# Altium PCB High.PcbDoc
Units mm, origin at the board's own origin, x right, y up, seen from the top; angles counter-clockwise.
Board outline 51 x 51 mm, 2 copper layers (Top Layer, Bottom Layer), stack 1.571 mm thick; 35 components, 47 nets, 125 pads, 22 vias.
Unrouted connection lines stored in the file: 28.
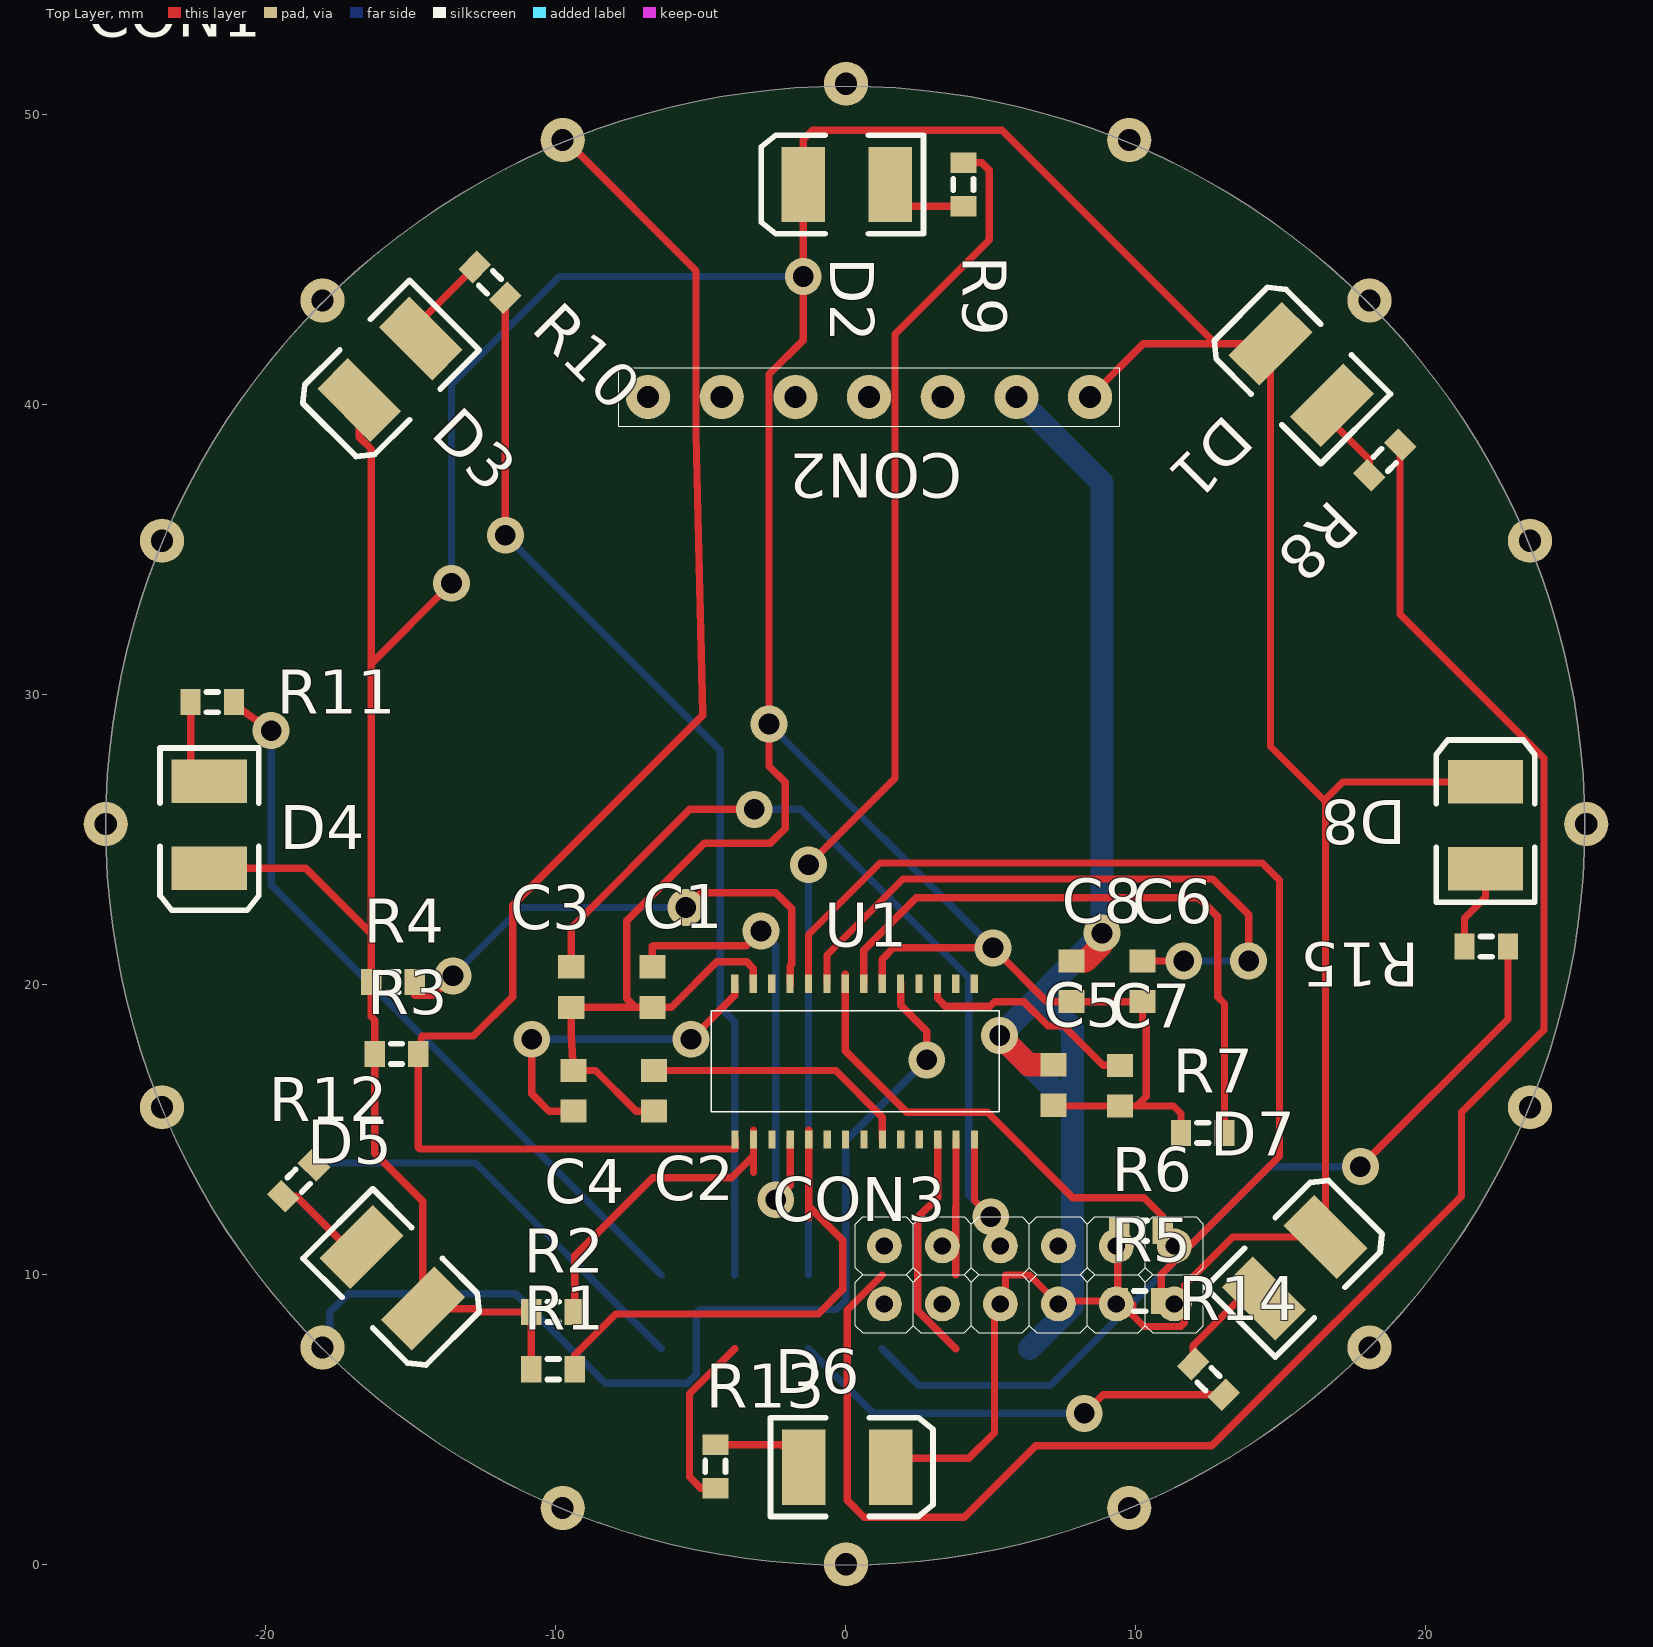
[diagram p0: Top Layer view]
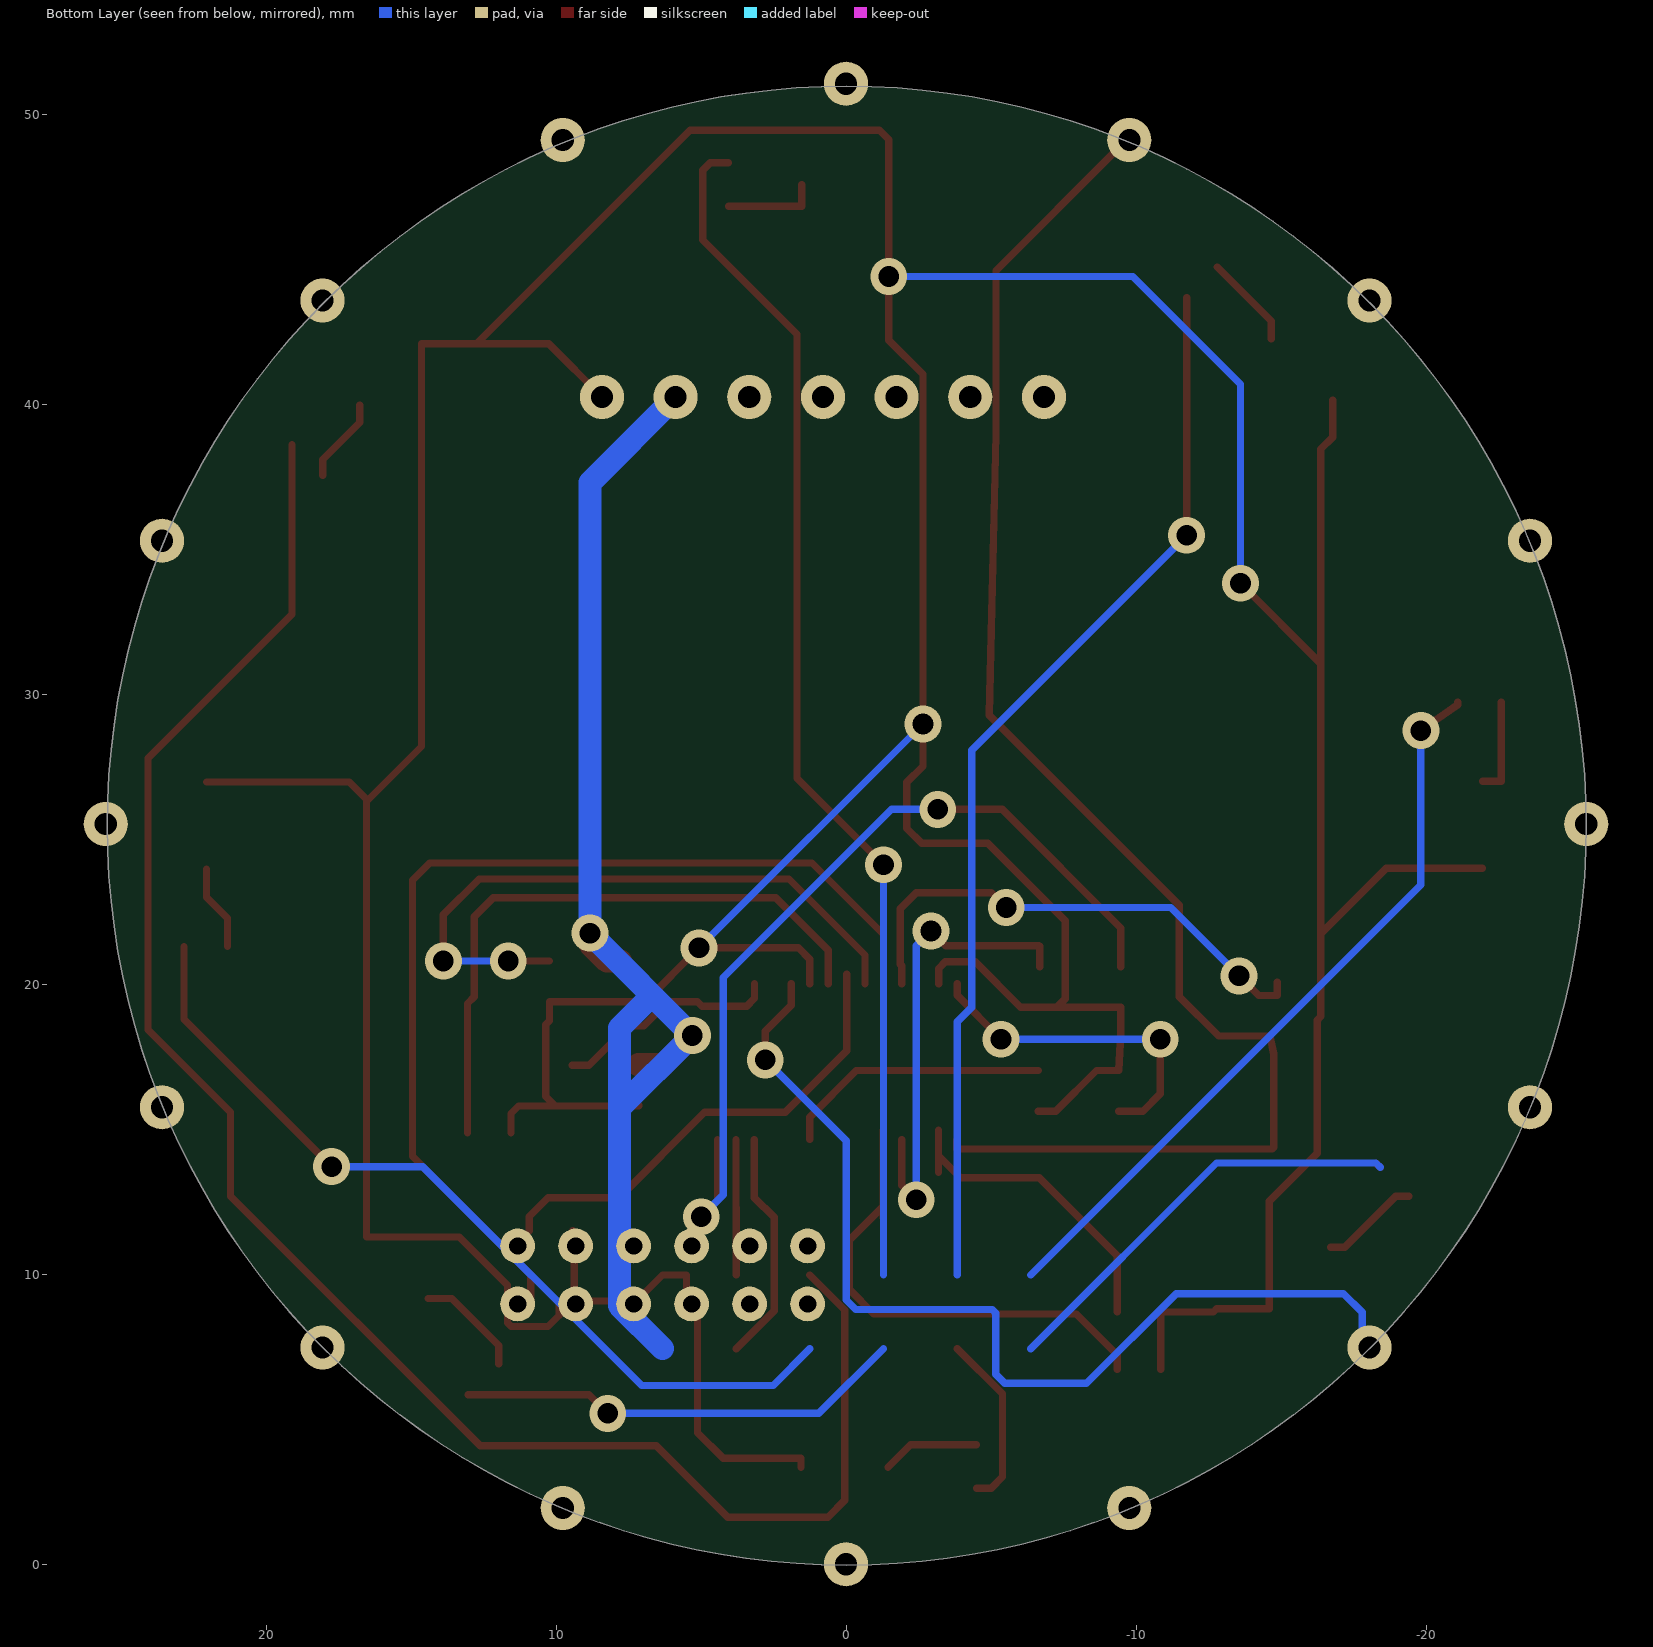
[diagram p1: Bottom Layer view, seen from below]

## Layer stack, top to bottom
Top Solder: solder mask 0.0102, Solder Resist, Dk 3.5
Top Layer: signal copper 0.0356
Dielectric 1: dielectric 1.5, FR-4, Dk 4.8
Bottom Layer: signal copper 0.0356
Bottom Solder: solder mask 0.0102, Solder Resist, Dk 3.5

## Board outline
0,-0.007 cw(c0,25.493) -25.5,25.493 cw(c0,25.493) 0,50.993 cw(c0,25.493) 25.5,25.493 cw(c0,25.493)

## Design rules (kind name [scope] priority, off if disabled: settings)
Clearance Clearance_ttp229 [InComponent('U1') And NetCON1_1 And NetCON1_2 And NetCON1_3 And NetCON1_4 And NetCON1_5 And NetCON1_6 And NetCON1_7 And NetCON1_8 And NetCON1_9 And NetCON1_10 And NetCON1_11 And NetCON1_12 And NetCON1_13 And NetCON1_14 And NetCON1_15 And NetCON1_16 vs InComponent('U1') And NetCON1_1 And NetCON1_2 And NetCON1_3 And NetCON1_4 And NetCON1_5 And NetCON1_6 And NetCON1_7 And NetCON1_8 And NetCON1_9 And NetCON1_10 And NetCON1_11 And NetCON1_12 And NetCON1_13 And NetCON1_14 And NetCON1_15 And NetCON1_16] p1: gap=0.15
Clearance [InNetClass('All Nets') vs InNetClass('All Nets')] p2: gap=0.3
PolygonConnect [All] p1: connectstyle=Relief reliefconductorwidth=0.254 reliefentries=4 polygonreliefangle="90 Angle" airgapwidth=0.254
RoomDefinition High [InComponentClass('High')] p1: confinementstyle=ConfineIn formatcopy=TRUE lockcomponents=FALSE outline -104,-63.507 -53.2,-63.507 -53.2,-38.107 -104,-38.107
RoutingVias [All] p1: holewidth=0.711 width=1.27 viastyle="Through Hole" minholewidth=0.711 minwidth=1.27 maxholewidth=0.711 maxwidth=1.27
SolderMaskExpansion [All] p1: expansion=0.102
Width Width_1 [InNet('VCC')] p1: maxlimit=0.8 minlimit=0.254 preferedwidth=0.8
Width [All] p2: maxlimit=0.254 minlimit=0.254 preferedwidth=0.254
30 further rules are at their usual default settings.

## Components (designator, comment, footprint, x,y, rotation, side; value= is the part's Value field where it differs from the comment)
C1 "Cap Semi" 1608[0603] -6.65,19.925 r90 top
C2 "Cap Semi" 1608[0603] -6.6,16.35 r90 top
C3 "Cap Semi" 1608[0603] -9.45,19.925 r90 top
C4 "Cap Semi" 1608[0603] -9.375,16.35 r90 top
C5 "Cap Semi" 1608[0603] 7.175,16.55 r90 top
C6 "Cap Semi" 1608[0603] 10.25,20.125 r90 top
C7 "Cap Semi" 1608[0603] 9.475,16.525 r90 top
C8 "Cap Semi" 1608[0603] 7.8,20.125 r90 top
CON1 "RoundSensorCon" RoundSensorCon 0.025,25.55 r0 top
CON2 "OLED" OLED -6.8,40.275 r0 top
CON3 "PIPE" PIPE_SMALL 6.35,10 r180 top
D1 "LED3" 3.5X2.8X1.9 15.725,41.05 r135 top
D2 "LED3" 3.5X2.8X1.9 0.05,47.6 r180 top
D3 "LED3" 3.5X2.8X1.9 -15.7,41.225 r225 top
D4 "LED3" 3.5X2.8X1.9 -21.925,25.525 r270 top
D5 "LED3" 3.5X2.8X1.9 -15.625,9.9 r315 top
D6 "LED3" 3.5X2.8X1.9 0.075,3.375 r0 top
D7 "LED3" 3.5X2.8X1.9 15.5,10.25 r45 top
D8 "LED3" 3.5X2.8X1.9 22.075,25.5 r90 top
R1 "Res3" J1-0603 -10.075,6.75 r0 top
R2 "Res3" J1-0603 -10.075,8.725 r0 top
R3 "Res3" J1-0603 -15.475,17.625 r0 top
R4 "Res3" J1-0603 -15.6,20.1 r0 top
R5 "Res3" J1-0603 10.15,9.1 r0 top
R6 "Res3" J1-0603 10.2,11.525 r0 top
R7 "Res3" J1-0603 12.325,14.9 r0 top
R8 "Res3" J1-0603 18.6,38.1 r225 top
R9 "Res3" J1-0603 4.075,47.6 r270 top
R10 "Res3" J1-0603 -12.25,44.225 r135 top
R11 "Res3" J1-0603 -21.825,29.75 r180 top
R12 "Res3" J1-0603 -18.85,13.25 r225 top
R13 "Res3" J1-0603 -4.475,3.4 r90 top
R14 "Res3" J1-0603 12.525,6.4 r135 top
R15 "Res3" J1-0603 22.1,21.325 r180 top
U1 "TTP229-BSF" SSOP-28 -3.8,14.671 r90 top

## Footprints (in the part's own frame and the unit in brackets; to place one, negate y for a bottom-side part, rotate by r counter-clockwise, add the part's x,y. Pads: shape width x height; smd on the part's side, far side on the other; paste and mask are expansions set on the pad)
3.5X2.8X1.9 [mm] "SM LED; 2 C-Bend Leads; Body 3.5 x 2.8 x 1.9 mm, inc leads (LxWxH typ)"
  rect 1.5x2.6 smd: 1(-1.5,0) 2(1.5,0)
  silkscreen extent -2.65,-1.7 2.95,1.7
1608[0603] [mm] "Chip Capacitor, Body 1.6x0.8mm, IPC High Density"
  rect 0.8x0.9 smd: 1(-0.7,0) 2(0.7,0)
  body extent -0.87,-0.48 0.87,0.48, height 1.3
J1-0603 [mm] "Chip Resistor, Body 1.6x0.8mm, IPC High Density"
  rect 0.7x0.9 smd: 1(-0.75,0) 2(0.75,0)
  silkscreen extent -0.2,-0.35 0.2,0.35, body extent -0.85,-0.48 0.85,0.48, height 0.9
OLED [mil]
  round 60 hole 30: 1(0,0) 2(100,0) 3(200,0) 4(300,0) 5(400,0) 6(500,0) 7(600,0)
  silkscreen extent -40,-40 640,40
PIPE_SMALL [mm]
  round 1.2 hole 0.6: 1(-5,-1) 2(-3,-1) 3(-1,-1) 4(1,-1) 5(3,-1) 6(5,-1) 7(5,1) 8(3,1) 9(1,1) 10(-1,1) 11(-3,1) 12(-5,1)
  silkscreen extent -6,-2 6,2
RoundSensorCon [mil]
  round 60 hole 30: 1(710.64,710.64) 2(384.6,928.5) 3(0,1005) 4(-384.6,928.5) 5(-710.64,710.64) 6(-928.5,384.6) 7(-1005,0) 8(-928.5,-384.6) 9(-710.64,-710.64) 10(-384.6,-928.5) 11(0,-1005) 12(384.6,-928.5) 13(710.64,-710.64) 14(928.5,-384.6) 15(1005,0) 16(928.5,384.6)
  Top Layer lines w0.39: -384.6,928.5 -368.99,922.03
SSOP-28 [mm]
  rect 0.635x0.25 smd: 1(0,0) 2(0,-0.635) 3(0,-1.27) 4(0,-1.905) 5(0,-2.54) 6(0,-3.175) 7(0,-3.81) 8(0,-4.445) 9(0,-5.08) 10(0,-5.715) 11(0,-6.35) 12(0,-6.985) 13(0,-7.62) 14(0,-8.255) 15(5.365,-8.248) 16(5.365,-7.613) 17(5.365,-6.978) 18(5.365,-6.343) 19(5.365,-5.708) 20(5.365,-5.073) 21(5.365,-4.438) 22(5.365,-3.803) 23(5.365,-3.168) 24(5.365,-2.533) 25(5.365,-1.898) 26(5.365,-1.263) 27(5.365,-0.628) 28(5.365,0.007)
  silkscreen extent 0.95,-9.12 4.44,0.82

## Part data
C1 C2 C3 C4 C5 C6 C7 C8: "Capacitor (Semiconductor SIM Model)"
D1 D2 D3 D4 D5 D6 D7 D8: "Typical BLUE SiC LED"
R1 R2 R3 R4 R5 R6 R7 R8 R9 R10 R11 R12 R13 R14 R15: "Resistor"

## Via types
v1: diameter 1.27, hole 0.711, Top Layer to Bottom Layer, 22 vias

## Nets (pads, with @x,y where several pads share a name; then routed paths per layer and width w, separated by ;. In a path a pad name is that pad's centre, name@x,y a point inside that pad or via, vN(x,y) a via of type N, cw(c..) or ccw(c..) an arc to the next point about the centre after c; other vN are vias at no path point)
GND: C1.1 C2.1 C3.1 C4.2 C5.1 C6.1 C7.1 C8.1 CON2.7 CON3.1 D1.2 D2.2 D3.2 D4.2 D5.2 D6.2 D7.2 D8.2 R1.1 R2.1 R3.1 R4.1 R5.1 R6.1 R7.1 U1.20 U1.27 | length 235.2
  Top Layer w0.254: D4.2 -18.605,24.025 -16.35,21.77 ; D3.2 -16.761,38.89 -16.35,38.479 -16.35,31.077 ; v1(-13.576,33.851) -16.35,31.077 ; R1.1 R2.1 -12.649,8.725 -12.763,8.839 D5.2 -14.564,12.541 -16.225,14.201 R3.1 -16.225,18.789 -16.35,18.914 R4.1 -16.35,21.77 ; C2.1 -7.211,15.65 -8.611,17.05 C4.2 -9.45,18.303 C3.1 -7.226,19.225 ; U1.27 -3.172,20.567 -3.401,20.796 -4.432,20.796 -6.003,19.225 C1.1 -7.226,19.225 ; U1.20 1.273,20.887 1.664,21.278 v1(5.093,21.278) 6.946,19.425 C8.1 ; D6.2 1.575,3.676 4.255,3.676 5.144,4.565 5.144,8.908 5.525,9.289 5.525,10 6.35,10 7.25,9.1 R5.1 ; C5.1 7.175,15.825 C7.1 10.046,15.825 ; C8.1 C6.1 10.25,18.764 10.376,18.637 10.376,16.155 10.046,15.825 ; CON2.7 10.276,42.111 12.764,42.111 ; R6.1 9.45,11.323 9.4,11.273 R5.1 ; R7.1 11.575,15.566 11.316,15.825 10.046,15.825 ; D8.2 17.152,27 16.561,26.409 16.561,26.327 ; -16.35,21.77 -16.35,31.077 ; -7.226,19.225 -7.531,19.53 -7.531,22.218 -4.864,24.885 -2.583,24.885 -2.075,25.393 -2.075,26.993 -2.629,27.547 v1(-2.629,29) -2.629,41.055 -1.45,42.233 v1(-1.45,44.428) D2.2 -1.45,49.152 -1.13,49.472 5.402,49.472 12.764,42.111 ; R5.1 9.792,9.1 9.919,8.973 9.919,8.604 10.3,8.223 11.57,8.223 11.697,8.35 11.697,9.65 13.357,11.311 D7.2 16.561,26.327 ; 12.764,42.111 D1.2 14.664,28.224 16.561,26.327
  Bottom Layer w0.254: v1(-13.576,33.851) -13.576,40.709 -9.857,44.428 v1(-1.45,44.428) ; v1(-2.629,29) v1(5.093,21.278)
NetC1_2: C1.2 U1.4 | length 16.4
  Top Layer w0.254: C1.2 -6.65,21.329 -6.625,21.354 -3.416,21.354 v1(-2.908,21.862) ; v1(-2.4,12.591) -1.895,13.096 U1.4
  Bottom Layer w0.254: v1(-2.908,21.862) -2.4,21.354 v1(-2.4,12.591)
NetC2_2: C2.2 U1.9 | length 9.3
  Top Layer w0.254: C2.2 -0.331,17.05 1.28,15.439 U1.9
NetC3_2: C3.2 U1.14 | length 30.6
  Top Layer w0.254: C3.2 -9.45,21.964 -5.361,26.053 v1(-3.137,26.053) ; U1.14 4.455,12.569 v1(5.017,12.007)
  Bottom Layer w0.254: v1(-3.137,26.053) -1.543,26.053 4.255,20.256 4.255,12.769 v1(5.017,12.007)
NetC4_1: C4.1 U1.28 | length 11.6
  Top Layer w0.254: v1(-10.813,18.129) -10.813,16.249 -10.214,15.65 C4.1 ; v1(-5.321,18.129) -3.807,19.643 U1.28
  Bottom Layer w0.254: v1(-10.813,18.129) v1(-5.321,18.129)
NetC6_2: C6.2 U1.23 | length 22.4
  Top Layer w0.254: U1.23 -0.632,21.033 1.988,23.653 12.675,23.653 13.907,22.421 v1(13.907,20.825) ; C6.2 v1(11.672,20.825)
  Bottom Layer w0.254: v1(11.672,20.825) v1(13.907,20.825)
NetC7_2: C7.2 U1.17 | length 7.9
  Top Layer w0.254: U1.17 3.178,19.535 3.442,19.272 4.991,19.272 5.144,19.424 6.16,19.424 6.998,18.586 7.531,18.586 8.892,17.225 C7.2
NetCON1_1: CON1.1 U1.6
NetCON1_2: CON1.2 R1.2 U1.5 | length 19.3
  Top Layer w0.254: R1.2 -9.325,7.241 -7.912,8.654 -0.934,8.654 -0.081,9.508 -0.081,11.194 -1.26,12.373 U1.5 ; -1.26,11.979 -1.26,15
NetCON1_3: CON1.3 R2.2 U1.2 | length 11.6
  Top Layer w0.254: R2.2 -9.325,10.661 -6.633,13.353 -3.924,13.353 -3.165,14.112 ; -3.165,13.531 -3.165,14.112 ; U1.2 -3.165,14.112 ; -3.165,15 -3.165,14.112
NetCON1_4: CON1.4 R3.2 U1.1 | length 52.6
  Top Layer w0.254: CON1.4@-9.347,48.97 -9.347,48.829 -5.149,44.63 -5.149,39.013 -4.915,29.305 -11.468,22.751 -11.468,19.598 -12.826,18.24 -14.592,18.24 R3.2 -14.725,14.395 -14.674,14.344 -3.8,14.344 U1.1
NetCON1_5: CON1.5 R4.2 U1.25 | length 17.8
  Top Layer w0.254: R4.2 -14.85,19.635 -14.203,19.635 v1(-13.525,20.313) ; v1(-5.499,22.67) -4.991,23.178 -2.4,23.178 -1.846,22.624 -1.846,20.715 -1.902,20.659 U1.25
  Bottom Layer w0.254: v1(-13.525,20.313) -11.168,22.67 v1(-5.499,22.67)
NetCON1_6: CON1.6 R5.2 U1.24 | length 35.4
  Top Layer w0.254: U1.24 -1.267,21.742 1.198,24.207 14.381,24.207 14.974,23.615 14.974,14.09 10.9,10.016 R5.2
NetCON1_7: CON1.7 R6.2 U1.22 | length 16.4
  Top Layer w0.254: U1.22 U1.22@0.005,20.036 ; 0.005,20.365 U1.22@0.005,20.036 ; R6.2 10.95,12.018 10.3,12.668 7.847,12.668 4.903,15.611 2.121,15.611 0.005,17.727 U1.22@0.005,20.036
NetCON1_8: CON1.8 R7.2 U1.21 | length 21.9
  Top Layer w0.254: U1.21 0.638,21.193 2.453,23.008 12.183,23.008 12.845,22.347 12.845,19.591 13.075,19.361 R7.2
NetCON1_9: CON1.9 U1.19 | length 35.6
  Top Layer w0.254: U1.19 1.908,19.297 2.807,18.398 v1(2.807,17.417)
  Bottom Layer w0.254: CON1.9 -17.777,7.5 -17.777,8.711 -17.132,9.356 -11.357,9.356 -8.267,6.267 -5.448,6.267 -5.143,6.572 -5.143,8.68 -5.016,8.807 -0.317,8.807 0.013,9.137 0.013,14.623 v1(2.807,17.417)
NetCON1_10: CON1.10 U1.18
NetCON1_11: CON1.11 U1.16
NetCON1_12: CON1.12 U1.15
NetCON1_13: CON1.13 U1.11
NetCON1_14: CON1.14 U1.10
NetCON1_15: CON1.15 U1.8
NetCON1_16: CON1.16 U1.7
NetCON2_1: CON2.1
NetCON2_2: CON2.2
NetCON2_3: CON2.3
NetCON2_4: CON2.4
NetCON2_5: CON2.5
NetCON3_2: CON3.2 U1.13 | length 4.7
  Top Layer w0.254: 3.81,10 3.81,12.312 3.82,12.322 U1.13
NetCON3_3: CON3.3 R8.1 | length 63.4
  Top Layer w0.254: 1.27,10 0.064,8.794 0.064,2.228 0.648,1.644 4.102,1.644 6.566,4.108 12.637,4.108 21.247,12.718 21.247,15.614 24.092,18.459 24.092,27.823 19.13,32.784 R8.1
NetCON3_4: CON3.4 R9.1 | length 41.7
  Top Layer w0.254: v1(-1.27,24.147) 1.715,27.131 1.715,42.436 4.966,45.688 4.966,48.096 4.712,48.35 R9.1
  Bottom Layer w0.254: -1.27,10 v1(-1.27,24.147)
NetCON3_5: CON3.5 R10.1 | length 37
  Top Layer w0.254: v1(-11.72,35.505) R10.1
  Bottom Layer w0.254: v1(-11.72,35.505) -4.305,28.091 -4.305,19.226 -3.81,18.731 -3.81,10
NetCON3_6: CON3.6 R11.1 | length 26
  Top Layer w0.254: R11.1 -21.075,29.66 v1(-19.799,28.771)
  Bottom Layer w0.254: v1(-19.799,28.771) -19.799,23.449 -6.35,10
NetCON3_7: CON3.7 R12.1 | length 15.1
  Top Layer w0.254: R12.1@-18.395,13.716 -18.25,13.861 R12.1
  Bottom Layer w0.254: -18.395,13.716 -18.25,13.861 -12.751,13.861 -6.35,7.46
NetCON3_8: CON3.8 R13.1 | length 6.1
  Top Layer w0.254: R13.1 -4.981,2.65 -5.372,3.041 -5.372,5.898 -3.81,7.46
NetCON3_9: CON3.9 R14.1 | length 15.5
  Top Layer w0.254: v1(8.243,5.225) 8.887,5.87 R14.1
  Bottom Layer w0.254: -1.27,7.46 0.965,5.225 v1(8.243,5.225)
NetCON3_10: CON3.10 R15.1 | length 29.8
  Top Layer w0.254: v1(17.763,13.734) 22.85,18.821 R15.1
  Bottom Layer w0.254: 1.27,7.46 2.539,6.191 7.07,6.191 14.614,13.734 v1(17.763,13.734)
NetCON3_11: CON3.11 U1.12 | length 8
  Top Layer w0.254: U1.12 3.185,12.668 2.502,11.985 2.502,8.768 3.81,7.46
NetD1_1: D1.1 R8.2 | length 3
  Top Layer w0.254: D1.1 16.786,39.402 18.07,38.118 R8.2
NetD2_1: D2.1 R9.2 | length 3.3
  Top Layer w0.254: D2.1 1.55,46.85 R9.2
NetD3_1: D3.1 R10.2 | length 3.2
  Top Layer w0.254: D3.1 -14.639,42.896 R10.2
NetD4_1: D4.1 R11.2 | length 3.4
  Top Layer w0.254: R11.2 -22.575,27.025 D4.1
NetD5_1: D5.1 R12.2 | length 3.4
  Top Layer w0.254: R12.2 -18.935,12.72 -17.176,10.961 D5.1
NetD6_1: D6.1 R13.2 | length 3.4
  Top Layer w0.254: R13.2 -2.2,4.15 D6.1
NetD7_1: D7.1 R14.2 | length 3.8
  Top Layer w0.254: R14.2 11.995,7.567 13.617,9.189 D7.1
NetD8_1: D8.1 R15.2 | length 3
  Top Layer w0.254: R15.2 21.35,22.294 22.075,23.019 D8.1
VCC: C5.2 C8.2 CON2.6 CON3.12 U1.26 | length 45.4
  Top Layer w0.8: v1(5.322,18.256) 6.327,17.25 C5.2 ; C8.2 8.268,20.825 8.852,21.409 v1(8.852,21.786)
  Bottom Layer w0.8: CON2.6 8.852,37.323 v1(8.852,21.786) v1(5.322,18.256) 7.836,15.741 ; 6.35,7.46 7.836,8.946 7.836,15.741 ; 6.725,19.625 7.836,18.514 7.836,15.741
pads on no net: U1.3

## Silkscreen, mask and mechanical layers (free items; w line width, h text height)
Mechanical 13:
  the board outline again, w0.2